# EAGLE board Tremendous Trug-Kasi (EAGLE 7.6.0)

Size 73.58 x 63.39 mm. Coordinates in mm from the lower left corner, seen from the top.
Outline: 0,0 56.82,0 56.82,53.33 0,53.33 0,0
Copper layers (1*16): Top 0.035mm / dielectric 1.5mm / Bottom 0.035mm
Design rules "default": minimum track width 10mil, minimum drill 24mil, track to track 8mil, track to pad 8mil, pad to pad 8mil, via to via 8mil, smd to smd 8mil, copper to edge 40mil, drill to drill 8mil, minimum pad ring 10mil, minimum via ring 8mil, stop-mask expansion 4mil, vias tented up to drill 0mil, thermal gap 10mil

## Footprints (pad centres in the part's own frame; a part is rotated, then mirrored left to right if it is on the bottom)
LED5MM = drill 0.813 octagon: A -1.27,0; K 1.27,0
0207/10 = drill 0.813 octagon: 1 -5.08,0; 2 5.08,0
B25V = drill 0.813 long: A 2.54,0.635; E -2.54,0.635; S 0,0.635
TL1105 = drill 1 pad 1.676: 1 -2.25,3.25; 2 2.25,3.25; 3 -2.25,-3.25; 4 2.25,-3.25
ARDUINO_UNO = drill 1.016 pad 1.88: 0 63.5,50.8; 1 60.96,50.8; 2 58.42,50.8; 3 55.88,50.8; 3.3V 35.56,2.54; 4 53.34,50.8; 5 50.8,50.8; 5V 38.1,2.54; 6 48.26,50.8; 7 45.72,50.8; 8 41.656,50.8; 9 39.116,50.8; 10 36.576,50.8; 11 34.036,50.8; 12 31.496,50.8; 13 28.956,50.8; A0 50.8,2.54; A1 53.34,2.54; A2 55.88,2.54; A3 58.42,2.54; A4 60.96,2.54; A5 63.5,2.54; AREF 23.876,50.8; GND 26.416,50.8; GND. 43.18,2.54; GND.. 40.64,2.54; I/OREF 30.48,2.54; N/C 27.94,2.54; RESET 33.02,2.54; SCL 18.796,50.8; SDA 21.336,50.8; VIN 45.72,2.54 | hole 3.2: 66.04,7.62; 66.04,35.56; 15.24,50.8; 13.97,2.54
1X16P-2.54-2.54-11.6-3.0-BLACK-MALE = drill 0.889 pad 1.651 square: 1 0,19.05 | drill 0.889 pad 1.651: 2 0,16.51; 3 0,13.97; 4 0,11.43; 5 0,8.89; 6 0,6.35; 7 0,3.81; 8 0,1.27; 9 0,-1.27; 10 0,-3.81; 11 0,-6.35; 12 0,-8.89; 13 0,-11.43; 14 0,-13.97; 15 0,-16.51; 16 0,-19.05

## Placement (x,y rotation side)
D1  [LED5MM]  5,60.88 0 top
D2  [LED5MM]  5,73.58 0 top  (outside the outline)
D3  [LED5MM]  5,86.28 0 top  (outside the outline)
D4  [LED5MM]  5,98.98 0 top  (outside the outline)
D5  [LED5MM]  5,111.68 0 top  (outside the outline)
D6  [LED5MM]  5,124.38 0 top  (outside the outline)
D7  [LED5MM]  5,137.08 0 top  (outside the outline)
D8  [LED5MM]  5,149.78 0 top  (outside the outline)
D9  [LED5MM]  5,162.48 0 top  (outside the outline)
D10  [LED5MM]  5,175.18 0 top  (outside the outline)
D11  [LED5MM]  5,187.88 0 top  (outside the outline)
D12  [LED5MM]  5,200.58 0 top  (outside the outline)
D13  [LED5MM]  5,213.28 0 top  (outside the outline)
D14  [LED5MM]  5,225.98 0 top  (outside the outline)
D15  [LED5MM]  5,238.68 0 top  (outside the outline)
D16  [LED5MM]  5,251.38 0 top  (outside the outline)
D17  [LED5MM]  5,340.28 0 top  (outside the outline)
D18  [LED5MM]  5,352.98 0 top  (outside the outline)
D19  [LED5MM]  5,365.68 0 top  (outside the outline)
D20  [LED5MM]  5,378.38 0 top  (outside the outline)
D21  [LED5MM]  5,391.08 0 top  (outside the outline)
D22  [LED5MM]  5,403.78 0 top  (outside the outline)
D23  [LED5MM]  5,416.48 0 top  (outside the outline)
D24  [LED5MM]  5,429.18 0 top  (outside the outline)
R5  10k‎Ω  [0207/10]  5,48.18 0 top
R6  220‎Ω  [0207/10]  5,264.08 0 top  (outside the outline)
R7  220‎Ω  [0207/10]  5,276.78 0 top  (outside the outline)
R8  220‎Ω  [0207/10]  5,289.48 0 top  (outside the outline)
R9  220‎Ω  [0207/10]  5,302.18 0 top  (outside the outline)
R10  220‎Ω  [0207/10]  5,327.58 0 top  (outside the outline)
Rpot5  250k‎Ω  [B25V]  5,35.48 0 top
S1  [TL1105]  5,314.88 0 top  (outside the outline)
U9  [ARDUINO_UNO]  5,10.08 0 top
U10  [1X16P-2.54-2.54-11.6-3.0-BLACK-MALE]  5,22.78 0 top

## Library data of the parts
D1-D24 R5-R10 Rpot5 S1 U9 U10 = AUTODESK_CIRCUITS_BREADBOARD

## Nets
N$1: U9.0
N$2: U9.1
N$3: U9.2 U10.14
N$4: Rpot5.S U10.3
N$5: U9.12 U10.4
N$6: U9.11 U10.6
N$7: U9.5 U10.11
N$8: U9.4 U10.12
N$9: U9.3 U10.13
N$10: R5.2 U10.15
N$11: R5.1 R10.2 Rpot5.A Rpot5.E S1.1 U9.5V U9.GND.. U10.1 U10.2 U10.5 U10.16
N$12: U10.9
N$13: U10.10
N$14: U10.7
N$15: U10.8
N$16: D1.K R6.2
N$17: D1.A D2.K
N$18: D2.A D3.K
N$19: D3.A D4.K
N$20: D4.A
N$21: D5.K R7.2
N$22: D5.A D6.K
N$23: D6.A D7.K
N$24: D7.A D8.K
N$25: D8.A
N$26: D9.K R8.2
N$27: D9.A D10.K
N$28: D10.A D11.K
N$29: D11.A D12.K
N$30: D12.A
N$31: D13.K R9.2
N$32: D13.A D14.K
N$33: D14.A D15.K
N$34: D15.A D16.K
N$35: D16.A
N$36: R6.1 U9.9
N$37: R7.1 U9.10
N$38: R8.1 U9.8
N$39: R9.1 U9.13
N$40: S1.4
N$41: R10.1 S1.2 U9.7
N$42: S1.3
N$43: D19.K
N$44: D19.A
N$45: D17.K U9.A2
N$46: D18.K D20.K U9.A3
N$47: D20.A
N$48: D21.A
N$49: D22.A
N$50: D17.A D22.K D23.K U9.A4
N$51: D23.A
N$52: D21.K D24.K U9.A5
N$53: D24.A
N$54: D18.A

## Tracks (layer width: path | path; a pad name or v marks a point on that pad's centre or on a via)
N$3  (1 unrouted)
N$4  (1 unrouted)
N$5  (1 unrouted)
N$6  (1 unrouted)
N$7  (1 unrouted)
N$8  (1 unrouted)
N$9  (1 unrouted)
N$10  (1 unrouted)
N$11  (10 unrouted)
N$16  (1 unrouted)
N$17  (1 unrouted)
N$18  (1 unrouted)
N$19  (1 unrouted)
N$21  (1 unrouted)
N$22  (1 unrouted)
N$23  (1 unrouted)
N$24  (1 unrouted)
N$26  (1 unrouted)
N$27  (1 unrouted)
N$28  (1 unrouted)
N$29  (1 unrouted)
N$31  (1 unrouted)
N$32  (1 unrouted)
N$33  (1 unrouted)
N$34  (1 unrouted)
N$36  (1 unrouted)
N$37  (1 unrouted)
N$38  (1 unrouted)
N$39  (1 unrouted)
N$41  (2 unrouted)
N$45  (1 unrouted)
N$46  (2 unrouted)
N$50  (3 unrouted)
N$52  (2 unrouted)